# EAGLE board schema_v1_5 (EAGLE 6.2)
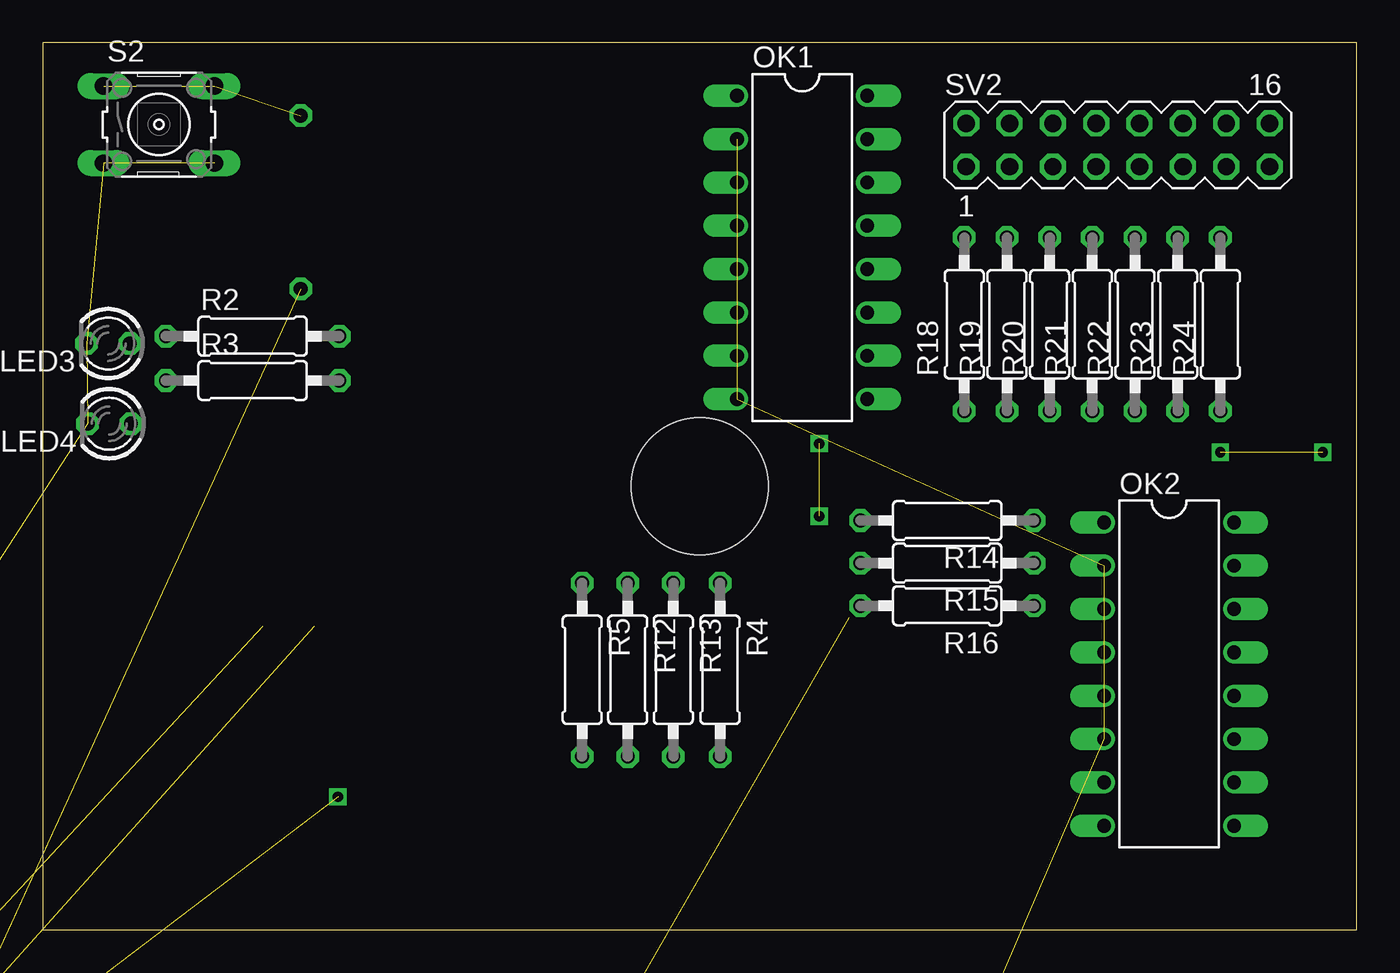
[diagram p0: board, top side]
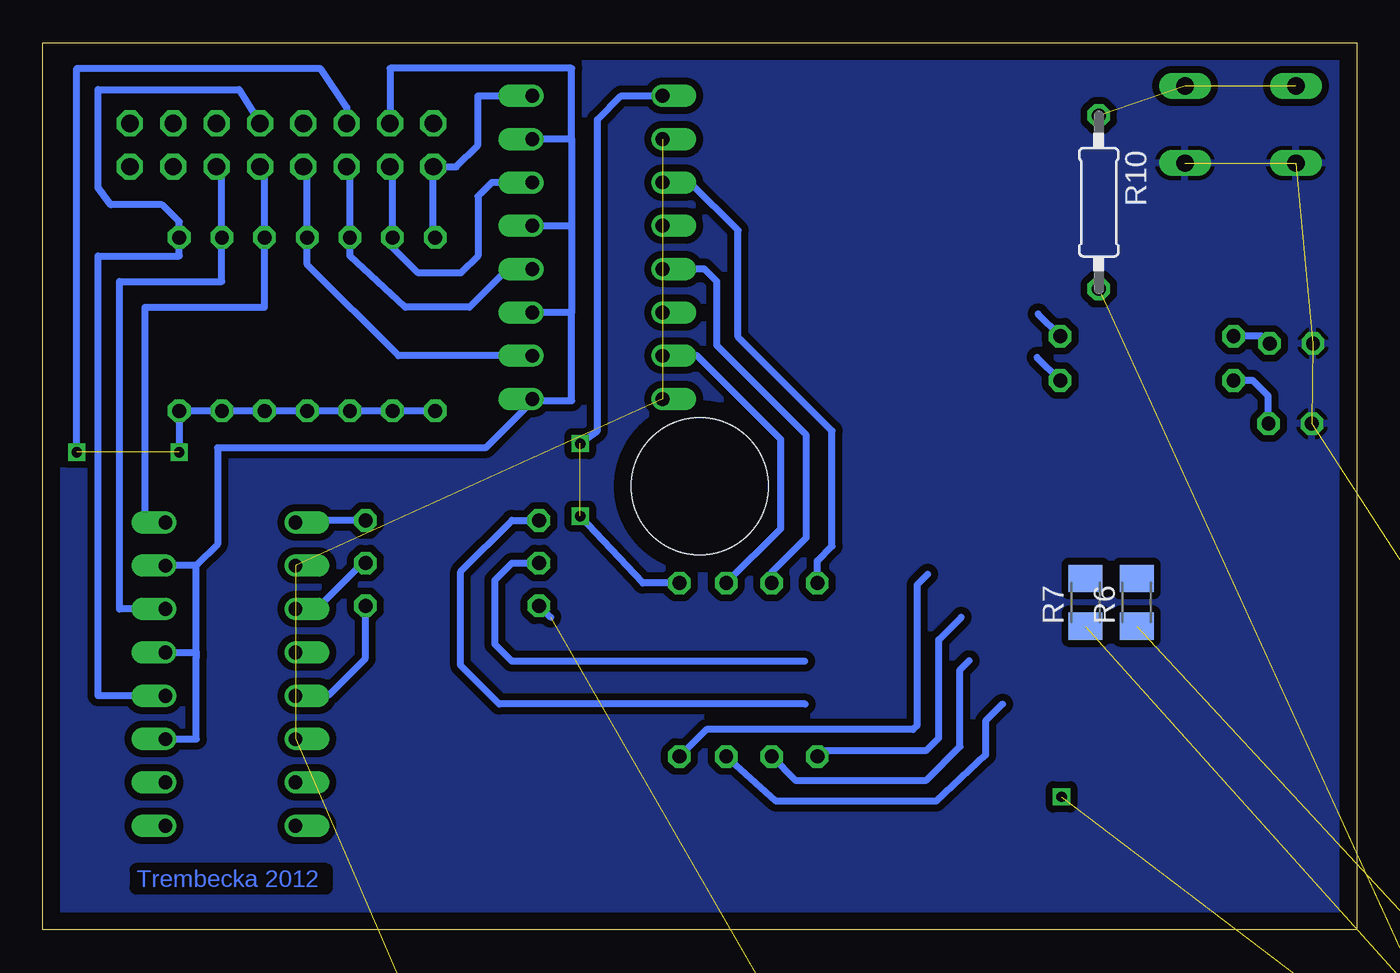
[diagram p1: board, bottom side, seen from below]

Size 77 x 52 mm. Coordinates in mm from the lower left corner, seen from the top.
Outline: 0,0 77,0 77,52 0,52 0,0
Copper layers (1*16): Top 0.035mm / dielectric 1.5mm / Bottom 0.035mm
Design rules: minimum track width 10mil, minimum drill 24mil, track to track 8mil, track to pad 8mil, pad to pad 8mil, via to via 8mil, smd to smd 8mil, copper to edge 40mil, drill to drill 8mil, minimum pad ring 10mil, minimum via ring 8mil, stop-mask expansion 4mil, vias tented up to drill 0mil, thermal gap 10mil
Net classes: 0 default: width 0.203 mm
Holes 8 mm at 38.5,26

## Footprints (pad centres in the part's own frame; a part is rotated, then mirrored left to right if it is on the bottom)
C025-025X050 = drill 0.813 octagon: 1 -1.27,0; 2 1.27,0
C0603K = smd 1.05 x 1.08: 1 -0.875,0; 2 0.875,0
E2,5-5 = drill 0.813 pad 1.6: + -1.27,0 | drill 0.813 pad 1.6 octagon: - 1.27,0
DO41-10 = drill 1.118: A 5.08,0; C -5.08,0
M0805 = smd 1.3 x 1.6: 1 -0.95,0; 2 0.95,0
DIL28-3 = drill 0.813 long: 1 -16.51,-3.81; 2 -13.97,-3.81; 3 -11.43,-3.81; 4 -8.89,-3.81; 5 -6.35,-3.81; 6 -3.81,-3.81; 7 -1.27,-3.81; 8 1.27,-3.81; 9 3.81,-3.81; 10 6.35,-3.81; 11 8.89,-3.81; 12 11.43,-3.81; 13 13.97,-3.81; 14 16.51,-3.81; 15 16.51,3.81; 16 13.97,3.81; 17 11.43,3.81; 18 8.89,3.81; 19 6.35,3.81; 20 3.81,3.81; 21 1.27,3.81; 22 -1.27,3.81; 23 -3.81,3.81; 24 -6.35,3.81; 25 -8.89,3.81; 26 -11.43,3.81; 27 -13.97,3.81; 28 -16.51,3.81
SPC4077 = drill 0.8 pad 2.184 long: 1 -3,0; 2 0,-4.8 | drill 1 pad 2.184 long: 3 3,0
79XXS = drill 1.016 long: GND -2.54,-2.54; IN 0,-2.54; OUT 2.54,-2.54
LED3MM = drill 0.813 octagon: A -1.27,0; K 1.27,0
DIL16 = drill 0.813 offset: 1 -8.89,-3.81; 2 -6.35,-3.81; 3 -3.81,-3.81; 4 -1.27,-3.81; 5 1.27,-3.81; 6 3.81,-3.81; 7 6.35,-3.81; 8 8.89,-3.81; 9 8.89,3.81; 10 6.35,3.81; 11 3.81,3.81; 12 1.27,3.81; 13 -1.27,3.81; 14 -3.81,3.81; 15 -6.35,3.81; 16 -8.89,3.81
TO92 = drill 0.813 octagon: 1 1.27,0; 2 0,1.905; 3 -1.27,0
0207/10 = drill 0.813 octagon: 1 -5.08,0; 2 5.08,0
M1206 = smd 1.6 x 2: 1 -1.4,0; 2 1.4,0
CT/CN0603 = smd 1 x 1: 1 -1,0; 2 1,0
B3F-10XX = drill 1.016 long: 1 -3.251,2.261; 2 3.251,2.261; 3 -3.251,-2.261; 4 3.251,-2.261
MA08-2 = drill 1.016 octagon: 1 -8.89,-1.27; 2 -8.89,1.27; 3 -6.35,-1.27; 4 -6.35,1.27; 5 -3.81,-1.27; 6 -3.81,1.27; 7 -1.27,-1.27; 8 -1.27,1.27; 9 1.27,-1.27; 10 1.27,1.27; 11 3.81,-1.27; 12 3.81,1.27; 13 6.35,-1.27; 14 6.35,1.27; 15 8.89,-1.27; 16 8.89,1.27
SSOP28DB = smd 0.348 x 1.397: 1 -4.225,-3.656; 2 -3.575,-3.656; 3 -2.925,-3.656; 4 -2.275,-3.656; 5 -1.625,-3.656; 6 -0.975,-3.656; 7 -0.325,-3.656; 8 0.325,-3.656; 9 0.975,-3.656; 10 1.625,-3.656; 11 2.275,-3.656; 12 2.925,-3.656; 13 3.575,-3.656; 14 4.225,-3.656; 15 4.225,3.656; 16 3.575,3.656; 17 2.925,3.656; 18 2.275,3.656; 19 1.625,3.656; 20 0.975,3.656; 21 0.325,3.656; 22 -0.325,3.656; 23 -0.975,3.656; 24 -1.625,3.656; 25 -2.275,3.656; 26 -2.925,3.656; 27 -3.575,3.656; 28 -4.225,3.656
PN61729-S = drill 0.95 octagon: 1 1.25,4.71; 2 -1.25,4.71; 3 -1.25,2.71; 4 1.25,2.71 | drill 2.3 pad 2.9: S1 -6.02,0; S2 6.02,0
W237-102 = drill 1.194 long: 1 -2.5,-1.27; 2 2.5,-1.27

## Placement (x,y rotation side)
C1  100nF  [C025-025X050]  -65,-221.6 0 top  (outside the outline)
C2  330nF  [C025-025X050]  -65,-248.1 0 top  (outside the outline)
C3  100nF  [C025-025X050]  -58.9,-221.6 0 top  (outside the outline)
C4  100nF  [C0603K]  -66.3,-164 0 top  (outside the outline)
C5  100nF  [C025-025X050]  -52.8,-221.6 0 top  (outside the outline)
C6  100nF  [C025-025X050]  -65,-254.7 0 top  (outside the outline)
C7  100nF  [C0603K]  -61.1,-164 0 top  (outside the outline)
C8  100nF  [C025-025X050]  -65,-190 0 top  (outside the outline)
C9  100nF  [C025-025X050]  -58.9,-190 0 top  (outside the outline)
C10  100nF  [C025-025X050]  -52.8,-190 0 top  (outside the outline)
C13  100nF  [C025-025X050]  -49,-100.1 0 top  (outside the outline)
C14  1uF  [E2,5-5]  -59,-118.3 0 top  (outside the outline)
C15  100nF  [C025-025X050]  -65,-118.5 0 top  (outside the outline)
C16  100nF  [C0603K]  -55.9,-164 0 top  (outside the outline)
D1  1N4001  [DO41-10]  -51,-213 0 top  (outside the outline)
D2  1N4001  [DO41-10]  -61.7,-274.2 0 top  (outside the outline)
D3  1N4001  [DO41-10]  -51,-181.4 0 top  (outside the outline)
FERRITE  [M0805]  -65.8,-138.7 0 top  (outside the outline)
IC1  MEGA8-P  [DIL28-3]  -46.2,-203.7 0 top  (outside the outline)
IC3  MEGA8-P  [DIL28-3]  -46.2,-172.1 0 top  (outside the outline)
J1  [SPC4077]  -57,-264.8 0 top  (outside the outline)
L7805  [79XXS]  -62.2,-238.3 0 top  (outside the outline)
LED1  [LED3MM]  -65.5,-236.1 0 top  (outside the outline)
LED3  [LED3MM]  3.84,34.37 180 top
LED4  [LED3MM]  3.9,29.67 180 top
LED5  [LED3MM]  -65.5,-59.5 0 top  (outside the outline)
LED6  [LED3MM]  -55.3,-159.8 0 top  (outside the outline)
LED7  [LED3MM]  -56.3,-59.5 0 top  (outside the outline)
LED8  [LED3MM]  -65.5,-68.3 0 top  (outside the outline)
LED9  [LED3MM]  -65.5,-77.1 0 top  (outside the outline)
LED10  [LED3MM]  -65.5,-85.9 0 top  (outside the outline)
LED11  [LED3MM]  -65.5,-94.7 0 top  (outside the outline)
LED12  [LED3MM]  -65.5,-133.8 0 top  (outside the outline)
LED13  [LED3MM]  -65.5,-159.8 0 top  (outside the outline)
OK1  PC847  [DIL16]  44.5,40 270 top
OK2  PC847  [DIL16]  66,15 270 top
Q1  BC547  [TO92]  -65,-286.5 0 top  (outside the outline)
R1  22k  [0207/10]  -61.7,-228.2 0 top  (outside the outline)
R2  330  [0207/10]  12.3,34.8 0 top
R3  330  [0207/10]  12.3,32.2 0 top
R4  220  [0207/10]  39.69,15.25 270 top
R5  220  [0207/10]  31.61,15.25 270 top
R6  1k  [M1206]  12.9,19.2 90 bottom
R7  1k  [M1206]  15.9,19.2 90 bottom
R8  22k  [0207/10]  -61.7,-196.6 0 top  (outside the outline)
R9  330  [0207/10]  -61.7,-232.7 0 top  (outside the outline)
R10  10k  [0207/10]  15.12,42.65 270 bottom
R11  330  [0207/10]  -61.7,-151.9 0 top  (outside the outline)
R12  220  [0207/10]  34.28,15.25 270 top
R13  220  [0207/10]  36.95,15.25 270 top
R14  220  [0207/10]  53,24 180 top
R15  220  [0207/10]  53,21.5 180 top
R16  220  [0207/10]  53,19 180 top
R17  10k  [0207/10]  -61.7,-8.3 0 top  (outside the outline)
R18  1k  [0207/10]  54,35.5 90 top
R19  1k  [0207/10]  56.5,35.5 90 top
R20  1k  [0207/10]  59,35.5 90 top
R21  1k  [0207/10]  61.5,35.5 90 top
R22  1k  [0207/10]  64,35.5 90 top
R23  1k  [0207/10]  66.5,35.5 90 top
R24  1k  [0207/10]  69,35.5 90 top
R25  330  [0207/10]  -61.7,-56.1 0 top  (outside the outline)
R26  330  [0207/10]  -49.4,-56.1 0 top  (outside the outline)
R27  1k  [M1206]  -48.3,-49.8 0 top  (outside the outline)
R28  1k  [M1206]  -43.3,-49.8 0 top  (outside the outline)
R29  330  [0207/10]  -61.7,-64.9 0 top  (outside the outline)
R30  1k  [M1206]  -65.3,-280.5 0 top  (outside the outline)
R31  330  [0207/10]  -61.7,-73.7 0 top  (outside the outline)
R32  330  [0207/10]  -61.7,-82.5 0 top  (outside the outline)
R33  330  [0207/10]  -61.7,-91.3 0 top  (outside the outline)
R34  330  [0207/10]  -55.1,-130 0 top  (outside the outline)
R35  VARISTORCN0603  [CT/CN0603]  -65.8,-124.2 0 top  (outside the outline)
R36  VARISTORCN0603  [CT/CN0603]  -52.1,-124.2 0 top  (outside the outline)
R37  330  [0207/10]  -61.7,-156.4 0 top  (outside the outline)
R38  220  [0207/10]  -61.7,-291.5 0 top  (outside the outline)
S2  [B3F-10XX]  6.82,47.2 0 top
S3  [B3F-10XX]  -62.5,-215 0 top  (outside the outline)
S4  [B3F-10XX]  -62.5,-183.4 0 top  (outside the outline)
SV2  [MA08-2]  63,46 0 top
U2  [SSOP28DB]  -60.4,-144.2 0 top  (outside the outline)
USB  PN61729-S  [PN61729-S]  -60,-105 0 top  (outside the outline)
X2  [W237-102]  -8.2,2.9 0 top  (outside the outline)
X3  [W237-102]  -18.4,2.9 0 top  (outside the outline)
X4  [W237-102]  -28.6,2.9 0 top  (outside the outline)
X5  [W237-102]  -38.8,2.9 0 top  (outside the outline)
X6  [W237-102]  -49,2.9 0 top  (outside the outline)
X7  [W237-102]  -59.2,2.9 0 top  (outside the outline)

## Library data of the parts
C1-C10 C13-C16 R1-R34 R37 R38 = rcl
D1-D3 = diode
FERRITE = resistor
IC1 IC3 = atmel; OC_FARNELL: unknown; OC_NEWARK: unknown
J1 = con-jack; OC_FARNELL: unknown; OC_NEWARK: unknown
L7805 = v-reg
LED1 LED3-LED13 = led
OK1 OK2 = optocoupler; OC_FARNELL: 9707735; OC_NEWARK: unknown
Q1 = transistor-npn
R35 R36 = varistor
S2-S4 = switch-omron; MPN: B3F-1000; OC_FARNELL: 176432; OC_NEWARK: 36M3542
SV2 = con-lstb; OC_FARNELL: unknown; OC_NEWARK: unknown
U2 = ftdichip-5
USB = con-berg; OC_FARNELL: unknown; OC_NEWARK: unknown
X2-X7 = con-wago-500; MPN: 237-102; OC_FARNELL: unknown; OC_NEWARK: 70K9898

## Nets
5V0: C3.1 C4.1 C5.1 C6.1 C9.1 C10.1 C13.2 C14.+ C15.2 C16.1 D1.C D3.C IC1.7 IC1.20 IC3.7 IC3.20 L7805.IN R1.2 R8.2 R10.2 R11.2 R34.2 R37.2 U2.4 U2.19 U2.20
+5V: R17.1
ENABLE: OK2.12 R24.2 SV2.10
GND: C1.2 C2.2 C3.2 C4.2 C5.2 C6.2 C7.1 C8.2 C9.2 C10.2 C13.1 C14.- C15.1 C16.2 FERRITE.1 IC1.8 IC1.22 IC3.8 IC3.22 J1.1 J1.2 L7805.GND LED1.K LED3.K LED4.K LED5.K LED7.K LED8.K LED9.K LED10.K LED11.K LED12.K Q1.1 S2.3 S2.4 S3.1 S3.2 S4.1 S4.2 U2.7 U2.18 U2.21 U2.25 U2.26 USB.4
N$1: D1.A IC1.1 R1.1 S3.3 S3.4
N$2: LED1.A R9.1
N$3: C1.1 IC1.21
N$4: R3.2
N$5: R10.1 S2.1 S2.2
N$6: LED3.A R2.1
N$7: LED4.A R3.1
N$8: D2.A J1.3
N$9: OK1.16 R18.2 SV2.1
N$10: R2.2
N$11: OK1.14 R19.2 SV2.3
N$12: OK1.12 R20.2 SV2.5
N$13: OK1.10 R21.2 SV2.7
N$14: OK2.16 R22.2 SV2.9
N$15: OK2.14 R23.2 SV2.11
N$16: C8.1 IC3.21
N$17: LED6.K U2.23
N$18: LED13.K U2.22
N$19: LED6.A R11.1
N$20: D3.A IC3.1 R8.1 S4.3 S4.4
N$21: IC3.14 R9.2
N$22: IC1.28 R30.2
N$23: OK1.2 OK1.4 OK1.6 OK1.8 OK2.2 OK2.4 OK2.6 Q1.3
N$24: Q1.2 R38.1
N$25: R6.2
N$26: R7.2
N$29: OK1.1 R4.1
N$30: OK1.3 R5.1
N$31: OK1.5 R12.1
N$32: OK1.7 R13.1
N$33: OK2.1 R14.1
N$34: OK2.3 R15.1
N$35: OK2.5 R16.1
N$36: LED5.A R25.1
N$37: R17.2 X2.1 X3.1 X4.1 X5.1 X6.1 X7.1
N$38: LED7.A R26.1
N$39: LED8.A R29.1
N$40: LED10.A R32.1
N$41: IC3.19 R26.2
N$42: LED9.A R31.1
N$43: IC3.2 R27.2
N$44: IC3.3 R28.2
N$45: IC3.18 R25.2
N$46: IC3.17 R29.2
N$47: IC3.16 R31.2
N$48: IC3.15 R32.2
N$49: LED11.A R33.1
N$50: R33.2
N$51: LED12.A R34.1
N$53: FERRITE.2 R35.2 R36.2 USB.S1 USB.S2
N$55: LED13.A R37.1
N$96: C7.2 U2.17
OPT1: R4.2
OPT2: R5.2
OPT3: R12.2
OPT4: R13.2
OPT5: R14.2
OPT6: R15.2
OPT7: IC3.27 R16.2
RXD: R7.1 R28.1 U2.5
STC102_5V: R18.1 R19.1 R20.1 R21.1 R22.1 R23.1 R24.1 SV2.6
STC102_GND: OK1.9 OK1.11 OK1.13 OK1.15 OK2.11 OK2.13 OK2.15 SV2.4
STOP: IC3.26 R38.2
SWITCH1: IC3.4 X7.2
SWITCH2: IC3.5 X6.2
SWITCH3: IC3.6 X5.2
SWITCH4: IC3.11 X4.2
SWITCH5: IC3.12 X3.2
SWITCH6: IC3.13 X2.2
TXD: R6.1 R27.1 U2.1
USBDM: R35.1 U2.16 USB.2
USBDP: R36.1 U2.15 USB.3
VIN: C2.1 D2.C L7805.OUT
WORKING: IC3.28 R30.1

## Tracks (layer width: path | path; a pad name or v marks a point on that pad's centre or on a via)
5V0  (25 unrouted)
ENABLE
  Bottom 0.406: SV2.10 65.5,49.25 73.75,49.25 73.75,43.5 73,42.5 70,42.5 69,41.5 R24.2 69,39.5 73.75,39.5 73.75,13.73 OK2.12
GND  (44 unrouted)
  pour Bottom (isolate 0.406): 0,52 77,52 77,0 0,0
N$1  (4 unrouted)
N$2  (1 unrouted)
N$3  (1 unrouted)
N$4
  Bottom 0.406: R3.2 18.74,33.56
N$5  (2 unrouted)
N$6
  Bottom 0.406: R2.1 5.54,34.8 LED3.A
N$7
  Bottom 0.406: R3.1 6.1,32.2 5.2,31.3 5.2,29.7
  Bottom 0.813: LED4.A 5.2,29.7
N$8  (1 unrouted)
N$9
  Bottom 0.406: R18.2 54.11,40.58 SV2.1 52.77,44.73 51.5,46 51.5,48.89 OK1.16
N$10
  Bottom 0.406: R2.2 18.68,36.1
N$11
  Bottom 0.406: SV2.3 56.5,44.58 R19.2 56.5,40 55,38.5 52.5,38.5 51.5,39.5 51.5,43 50.69,43.81 OK1.14
N$12
  Bottom 0.406: SV2.5 59,44.54 R20.2 59,39.5 55.75,36.5 52,36.5 49.77,38.73 OK1.12
N$13
  Bottom 0.406: SV2.7 61.5,44.5 R21.2 61.5,39 56.15,33.65 OK1.10
N$14
  Bottom 0.406: SV2.9 64,44.46 R22.2 64,36.5 71,36.5 71,23.89 OK2.16
N$15
  Bottom 0.406: SV2.11 66.5,44.42 R23.2 66.5,38 72.5,38 72.5,18.81 OK2.14
N$16  (1 unrouted)
N$17  (1 unrouted)
N$18  (1 unrouted)
N$19  (1 unrouted)
N$20  (4 unrouted)
N$21  (1 unrouted)
N$22  (1 unrouted)
N$23  (7 unrouted)
N$24  (1 unrouted)
N$29  (via drill 0.6)  (1 unrouted)
  Bottom 0.406: R4.1 41.83,20.33 v45.5,24.25 | v45.5,28.5 44.5,29.25 44.5,47.5 43.11,48.89 OK1.1
N$30
  Bottom 0.406: R5.1 31.61,21.64 30.75,22.5 30.75,29.25 36.25,34.75 36.25,41 39.06,43.81
  Bottom 0.61: 39.06,43.81 OK1.3
N$31
  Bottom 0.406: R12.1 34.28,20.97 32.25,23 32.25,29 37.5,34.25 37.5,38 38.23,38.73 OK1.5
N$32
  Bottom 0.406: OK1.7 38.65,33.65 33.75,28.75 33.75,23.53 R13.1
N$33
  Bottom 0.406: R14.1 62.08,24 62.08,23.89 OK2.1
N$34
  Bottom 0.406: 58.25,21.5 61,18.75 62.13,18.75
  Bottom 0.813: 58.25,21.5 R15.1 | 62.13,18.75 OK2.3
N$35
  Bottom 0.406: R16.1 58.08,15.92 60.25,13.75 62.17,13.75
  Bottom 0.813: 62.17,13.75 OK2.5
N$36  (via drill 0.6)  (2 unrouted)
  other vias: 17.3,7.8
N$37  (6 unrouted)
N$38  (1 unrouted)
N$39  (1 unrouted)
N$40  (1 unrouted)
N$41  (1 unrouted)
N$42  (1 unrouted)
N$43  (1 unrouted)
N$44  (1 unrouted)
N$45  (1 unrouted)
N$46  (1 unrouted)
N$47  (1 unrouted)
N$48  (1 unrouted)
N$49  (1 unrouted)
N$51  (1 unrouted)
N$53  (4 unrouted)
N$55  (1 unrouted)
N$96  (1 unrouted)
OPT1
  Bottom 0.406: R4.2 38.11,11.75 26,11.75 25.75,12 25.75,20.25 25.14,20.86
OPT2
  Bottom 0.406: R5.2 31.28,10.5 25.25,10.5 24.5,11.25 24.5,17 23.18,18.32
OPT3
  Bottom 0.406: R12.2 32.86,8.75 25.25,8.75 23.25,10.75 23.25,15.25 22.72,15.78
OPT4
  Bottom 0.406: R13.2 34.03,7.55 24.65,7.55 21.75,10.25 21.75,12.25 20.76,13.24
OPT5
  Bottom 0.406: R14.2 49.5,24 52.5,21 52.5,15.5 50.25,13.25 32.32,13.25
OPT6
  Bottom 0.406: R15.2 49.5,21.5 50.5,20.5 50.5,16.75 49.5,15.75 32.34,15.75
OPT7  (1 unrouted)
  Bottom 0.406: 47.24,18.32 R16.2
RXD  (2 unrouted)
STC102_5V  (via drill 0.6)  (1 unrouted)
  Bottom 0.406: R18.1 R19.1 R20.1 R21.1 R22.1 R23.1 R24.1 v69,28 | SV2.6 59.19,48.19 60.75,50.5 75,50.5 v75,28
STC102_GND
  Bottom 0.406: 68,21.35 OK2.15 | 46,46.35 OK1.15 | 46,36.19 OK1.11 | 46,36.19 46,31 48.31,31 | SV2.4 56.65,50.5 46,50.5 46,46.35 | 68,21.35 66.75,22.6 66.75,28.25 51.06,28.25 48.31,31 | 46,46.35 46,41.27 | 46,41.27 46,36.19 | OK1.13 46,41.27 | 48.31,31 OK1.9 | OK2.11 68,11.19 68,16 68,16.27 | 68,16.27 68,21.35 | OK2.13 68,16.27
STOP  (1 unrouted)
SWITCH1  (1 unrouted)
SWITCH2  (1 unrouted)
SWITCH3  (1 unrouted)
SWITCH4  (1 unrouted)
SWITCH5  (1 unrouted)
SWITCH6  (1 unrouted)
TXD  (2 unrouted)
USBDM  (2 unrouted)
USBDP  (2 unrouted)
VIN  (2 unrouted)
WORKING  (1 unrouted)

## Text on the board
Bottom: Trembecka 2012